# Altium PCB ETL_RB.PcbDoc (part 2 of 3)
Units mm, origin at the board's own origin, x right, y up, seen from the top; angles counter-clockwise.
Board outline 130.3 x 56.5 mm, 8 copper layers (Top Layer, plane 1, M1, plane 2, plane 3, M2, plane 4, Bottom Layer), stack 0.937 mm thick; 226 components, 231 nets, 2035 pads, 85 vias.
Unrouted connection lines stored in the file: 487.
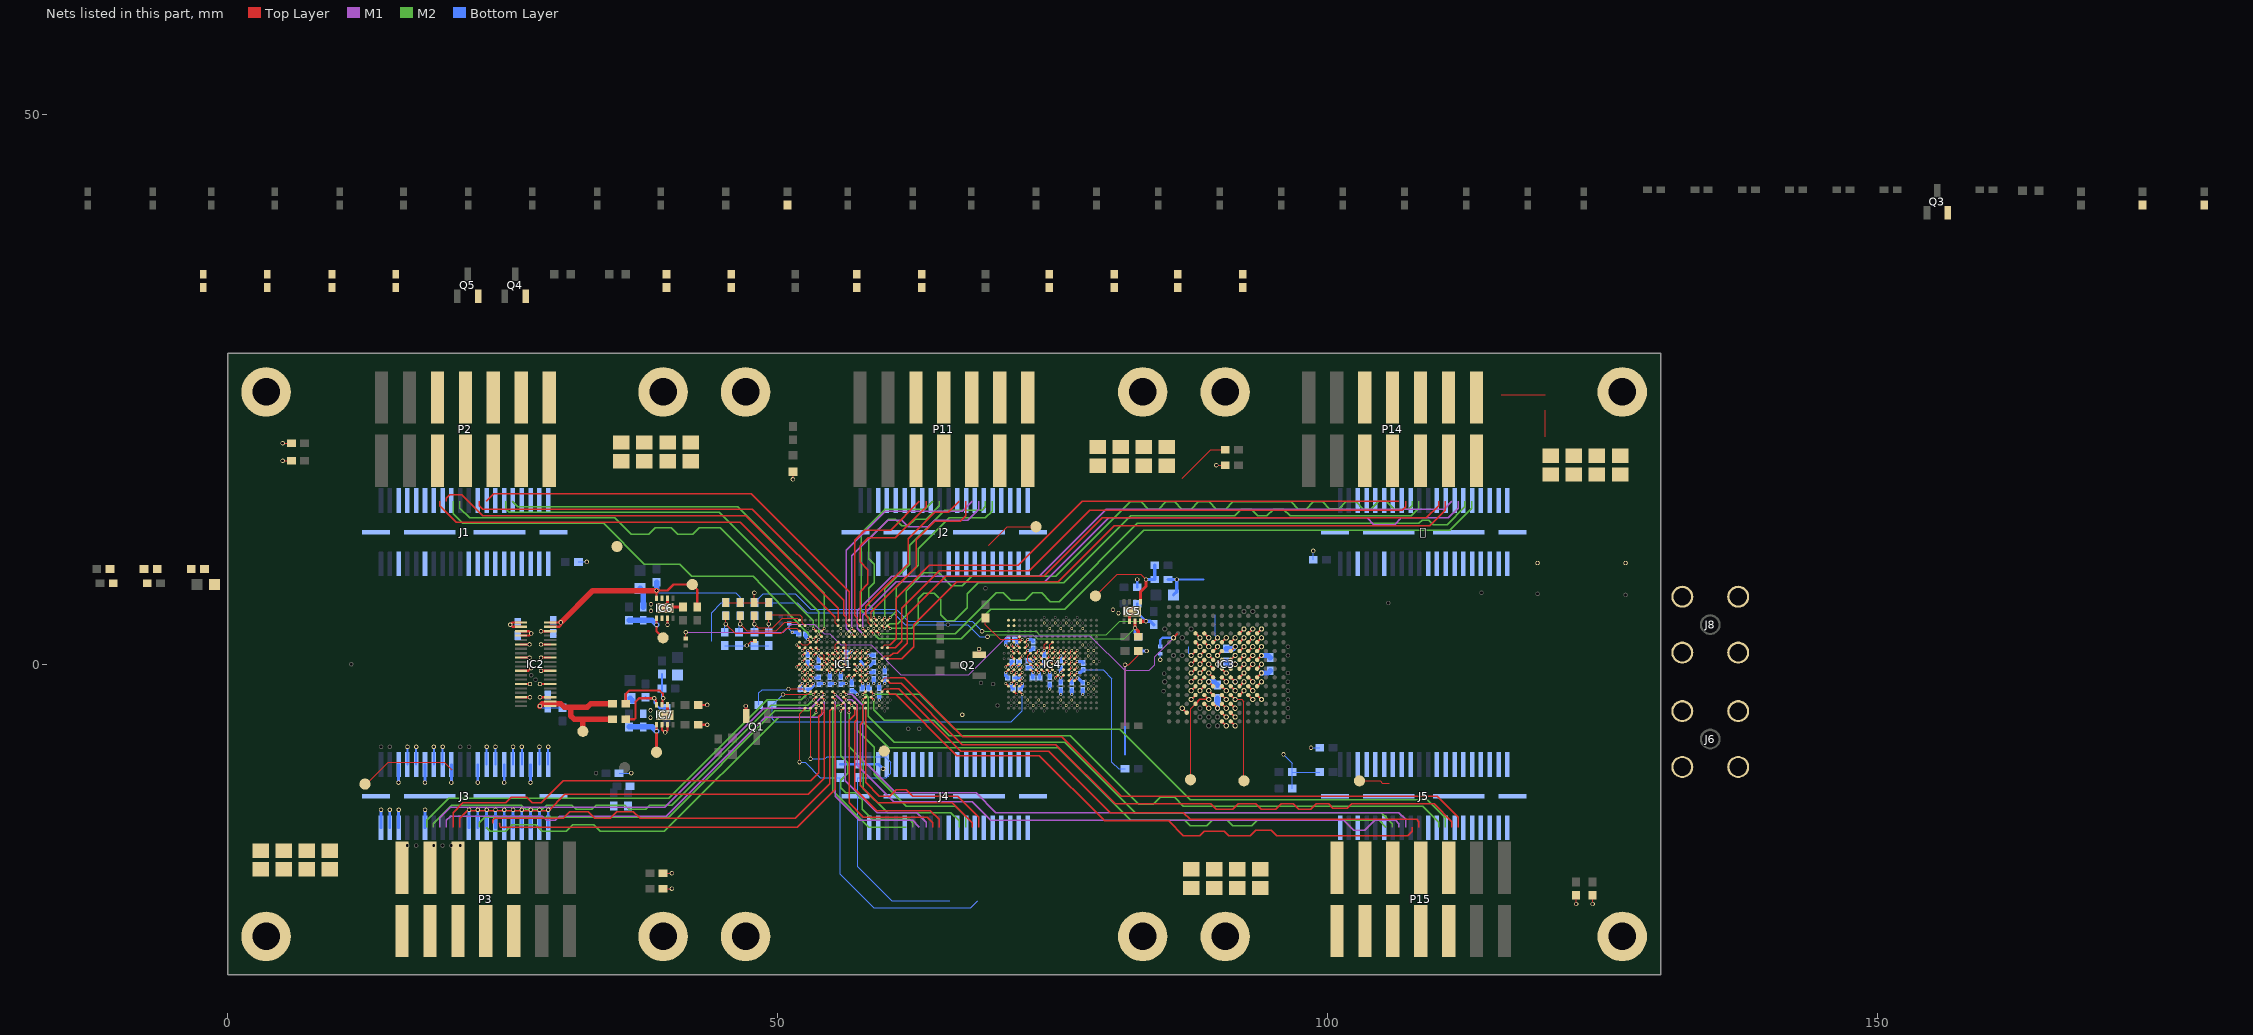
[diagram p8: the nets of this part, all layers, seen from the top]

## Via types
v1: diameter 0.4, hole 0.25, Top Layer to Bottom Layer, 85 vias

## Nets (pads, with @x,y where several pads share a name; then routed paths per layer and width w, separated by ;. In a path a pad name is that pad's centre, name@x,y a point inside that pad or via, vN(x,y) a via of type N, cw(c..) or ccw(c..) an arc to the next point about the centre after c; other vN are vias at no path point)
1V2_RB: C111.1 C112.1 C113.1 C114.1 C115.1 C116.1 C117.1 C118.1 C119.1 C120.1 C121.1 C122.1 C123.1 C124.1 C125.1 C126.1 C127.1 C128.1 C129.1 C130.1 C131.1 C132.1 C133.1 C134.1 C135.1 C160.1 C162.1 C163.1 C164.1 C165.1 C166.1 C167.1 C168.1 IC1.D3 IC1.E1 IC1.E3 IC1.E4 IC1.E9 IC1.F3 IC1.F9 IC1.G3 IC1.G5 IC1.H3 IC1.J3 IC1.J5 IC1.J6 IC1.J7 IC1.J8 IC1.J9 IC1.J11 IC1.K3 IC1.K5 IC1.K6 IC1.K7 IC1.K8 IC1.K9 IC1.K11 IC1.K12 IC1.K13 IC1.L3 IC1.L10 IC1.L11 IC1.L12 IC1.L13 IC1.M3 IC1.M12 IC1.M13 IC1.N3 IC1.P2 IC2.38 IC2.40 IC4.D3 IC4.E2 IC4.E3 IC4.E4 IC4.F3 IC4.G3 IC4.G5 IC4.H3 IC4.J3 IC4.J5 IC4.J6 IC4.J7 IC4.J8 IC4.J9 IC4.J11 IC4.K3 IC4.K6 IC4.K7 IC4.K8 IC4.K9 IC4.K11 IC4.K12 IC4.K13 IC4.L3 IC4.L10 IC4.L11 IC4.L12 IC4.L13 IC4.M3 IC4.M12 IC4.M13 IC4.N3 IC4.P2 IC4.T3 IC6.2 IC6.3 IC7.2 IC7.3 P11.10 P11.11 P11.12 P11.13 P11.14 pad.1@25.7,3.6 pad.1@36.7,-9.9 pad.1@52.75,1.25 pad.1@52.75,2.25 pad.1@52.75,-1.25 pad.1@53.25,0.25 pad.1@53.25,1.25 pad.1@53.25,-0.25 pad.1@53.25,-0.75 pad.1@53.25,-1.25 pad.1@53.25,-1.75 pad.1@53.75,2.25 pad.1@54.25,0.25 pad.1@54.25,-0.25 pad.1@54.75,-0.25 pad.1@54.75,-0.75 pad.1@55.25,-0.25 pad.1@55.25,-0.75 pad.1@55.75,-0.25 pad.1@55.75,-0.75 pad.1@56.25,-0.25 pad.1@56.25,-1.25 pad.1@56.75,-1.25 pad.1@57.25,-0.25 pad.1@57.25,-0.75 pad.1@57.75,-0.75 pad.1@57.75,-1.25 pad.1@57.75,-1.75 pad.1@58.25,-0.25 pad.1@58.25,-0.75 pad.1@58.25,-1.25 pad.1@59.25,-1.75 pad.1@59.75,-1.75 pad.1@66.8,-4.6 pad.1@71.75,1.25 pad.1@71.75,1.75 pad.1@71.75,-0.25 pad.1@72.25,0.75 pad.1@72.25,2.25 pad.1@72.25,-0.25 pad.1@72.25,-0.75 pad.1@72.25,-1.25 pad.1@72.25,-1.75 pad.1@72.75,2.25 pad.1@73.25,-0.25 pad.1@73.75,0.25 pad.1@73.75,-0.25 pad.1@73.75,-0.75 pad.1@74.25,-0.25 pad.1@74.25,-0.75 pad.1@74.75,0.25 pad.1@74.75,-0.25 pad.1@74.75,-0.75 pad.1@75.25,-1.25 pad.1@75.75,-0.75 pad.1@75.75,-1.25 pad.1@76.25,0.25 pad.1@76.75,-0.25 pad.1@76.75,-0.75 pad.1@76.75,-1.25 pad.1@77.25,-0.25 pad.1@77.25,-0.75 pad.1@77.25,-1.25 R14.1 R15.1 R101.2 R103.1 R104.1 R105.2 R106.2 R107.1 R109.2 R110.2 R202.2 R204.2 R206.2 R208.2 R210.2 R237.2 R238.2 R239.2 R244.2 R245.2 R246.2 TP6.1 | length 90.3
  Top Layer w0.076: R204.2@39.6,-20.4 v1(40.4,-20.4) ; v1(51,-2.25) 52.25,-2.25 IC1.P2@52.5,-2.5 ; IC1.E1@52,2 52.25,1.75 52.75,1.75 IC1.E3@53,2 ; pad.1@52.75,2.25 IC1.D3@53,2.5 ; IC1.K5@54,-0.5 pad.1@54.25,-0.25 ; IC1.G5@54,1 54.25,0.75 pad.1@54.25,0.25 ; IC1.F9@56,1.5 56.25,1.5 ; IC1.E9@56,2 56.25,1.75 56.25,1.5 ; pad.1@56.25,-0.25 56.25,1.5 ; R238.2@68.9,4.2 68.9,3.6 70.25,2.25 72,2.25 ; IC4.D3@72,2.5 72,2.25 ; pad.1@72.25,2.25 72,2.25 ; IC4.J5@73,0 72.75,0.25 72.75,0.75 IC4.G5@73,1 ; 86.8,16.9 89.4,19.5 R206.2@90.7,19.5 ; v1(122.6,-21.8) R208.2@122.6,-21
  Top Layer w0.102: v1(5,20.1) R202.2@5.8,20.1
  Top Layer w0.13: pad.1@52.75,-1.25 IC1.M3@53,-1.5 ; pad.1@52.75,1.25 IC1.G3@53,1 ; pad.1@52.75,2.25 IC1.E3@53,2 ; IC1.N3@53,-2 pad.1@53.25,-1.75 ; IC1.L3@53,-1 pad.1@53.25,-1.25 ; IC1.K3@53,-0.5 pad.1@53.25,-0.75 ; IC1.J3@53,0 pad.1@53.25,-0.25 ; IC1.H3@53,0.5 pad.1@53.25,0.25 ; IC1.F3@53,1.5 pad.1@53.25,1.25 ; IC1.E4@53.5,2 pad.1@53.75,2.25 ; IC1.J5@54,0 pad.1@54.25,-0.25 ; pad.1@54.25,0.25 IC1.J6@54.5,0 ; IC1.K6@54.5,-0.5 pad.1@54.75,-0.75 ; pad.1@54.75,-0.25 IC1.K7@55,-0.5 ; IC1.J7@55,0 pad.1@55.25,-0.25 ; pad.1@55.25,-0.75 IC1.K8@55.5,-0.5 ; IC1.J8@55.5,0 pad.1@55.75,-0.25 ; pad.1@55.75,-0.75 IC1.K9@56,-0.5 ; IC1.J9@56,0 pad.1@56.25,-0.25 ; pad.1@56.25,-1.25 IC1.L10@56.5,-1 ; pad.1@56.75,-1.25 IC1.L11@57,-1 ; IC1.K11@57,-0.5 pad.1@57.25,-0.75 ; IC1.J11@57,0 pad.1@57.25,-0.25 ; IC1.M12@57.5,-1.5 pad.1@57.75,-1.75 ; IC1.L12@57.5,-1 pad.1@57.75,-1.25 ; IC1.K12@57.5,-0.5 pad.1@57.75,-0.75 ; IC1.M13@58,-1.5 pad.1@58.25,-1.25 ; IC1.L13@58,-1 pad.1@58.25,-0.75 ; IC1.K13@58,-0.5 pad.1@58.25,-0.25 ; IC4.P2@71.5,-2.5 71.75,-2.75 ; pad.1@71.75,-0.25 IC4.J3@72,0 ; pad.1@71.75,1.25 IC4.G3@72,1 ; pad.1@71.75,1.75 IC4.F3@72,1.5 ; IC4.N3@72,-2 pad.1@72.25,-1.75 ; IC4.M3@72,-1.5 pad.1@72.25,-1.25 ; IC4.L3@72,-1 pad.1@72.25,-0.75 ; IC4.K3@72,-0.5 pad.1@72.25,-0.25 ; IC4.H3@72,0.5 pad.1@72.25,0.75 ; IC4.E3@72,2 pad.1@72.25,2.25 ; IC4.E4@72.5,2 pad.1@72.75,2.25 ; IC4.J5@73,0 pad.1@73.25,-0.25 ; IC4.K6@73.5,-0.5 pad.1@73.75,-0.75 ; IC4.J6@73.5,0 pad.1@73.75,-0.25 ; pad.1@73.75,0.25 IC4.J7@74,0 ; IC4.K7@74,-0.5 pad.1@74.25,-0.75 ; pad.1@74.25,-0.25 IC4.J8@74.5,0 ; IC4.K8@74.5,-0.5 pad.1@74.75,-0.75 ; pad.1@74.75,-0.25 IC4.K9@75,-0.5 ; pad.1@74.75,0.25 IC4.J9@75,0 ; pad.1@75.25,-1.25 IC4.L10@75.5,-1 ; pad.1@75.75,-1.25 IC4.L11@76,-1 ; pad.1@75.75,-0.75 IC4.K11@76,-0.5 ; IC4.J11@76,0 pad.1@76.25,0.25 ; IC4.M12@76.5,-1.5 pad.1@76.75,-1.25 ; IC4.L12@76.5,-1 pad.1@76.75,-0.75 ; IC4.K12@76.5,-0.5 pad.1@76.75,-0.25 ; IC4.M13@77,-1.5 pad.1@77.25,-1.25 ; IC4.L13@77,-1 pad.1@77.25,-0.75 ; IC4.K13@77,-0.5 pad.1@77.25,-0.25
  Top Layer w0.2: IC2.38@26.67,3.4 25.9,3.4 pad.1@25.7,3.6 25.9,3.8 IC2.40@26.67,3.8 ; IC7.2@39.5,-5.5 39.5,-5.945 39.755,-6.2 v1(39.8,-6.2) 39.8,-6.19 40,-5.99 IC7.3@40,-5.5 ; v1(40,3.6) IC6.3@40,4.2
  Bottom Layer w0.076: C133.1@71.56,2.25 C133.1@71.6,2.25
  Bottom Layer w0.102: R239.2@31.9,9.3 32.6,9.3 v1(32.65,9.3) ; R103.1@35.6,-9.9 pad.1@36.7,-9.9 ; R101.2@48.3,-3.7 48.3,-2.6 48.6,-2.3 50.95,-2.3 v1(51,-2.25) ; C166.1@77.8,-0.51 77.81,-0.5 79.6,-0.5 80.4,-1.3 80.4,-8.9 81,-9.5 R107.1@81.6,-9.5 ; v1(96,-8.2) 96.8,-9 R210.2@96.8,-9.8 ; R245.2@96.8,-11.3 R210.2@96.8,-9.8 ; v1(98.5,-7.6) R244.2@99.3,-7.6 ; R237.2@98.7,9.5 98.7,9.6 v1(98.7,10.3) ; R246.2@99.3,-9.8 R210.2@96.8,-9.8
  Bottom Layer w0.13: pad.1@71.75,-0.25 pad.1@71.8,-0.2
  Bottom Layer w0.2: pad.1@53.75,2.25 pad.1@53.79,2.25 ; C113.1@59.75,-1.31 59.79,-1.31 C113.1@59.8,-1.3
  Bottom Layer w0.25: R110.2@55.7,-9.1 59.2,-9.1 v1(59.6,-9.5)
  Bottom Layer w0.3: C119.1@52.56,2.75 52.56,2.44 pad.1@52.75,2.25 ; C125.1@52.71,-2.3 52.9,-2.3 53.25,-1.95 pad.1@53.25,-1.75 ; C116.1@52.75,0.81 pad.1@52.75,1.25 ; pad.1@53.25,-1.25 53.69,-1.25 C117.1@53.75,-1.19 ; pad.1@53.25,-0.25 53.75,-0.25 C126.1@53.75,-0.31 ; C114.1@54.75,-1.19 pad.1@54.75,-0.75 ; C122.1@55.75,-1.19 pad.1@55.75,-0.75 ; pad.1@56.25,-0.25 C120.1@56.25,0.44 ; C118.1@56.75,-1.79 pad.1@56.75,-1.25 ; C123.1@57.7,-2.25 C123.1@57.69,-2.25 57.75,-2.19 pad.1@57.75,-1.75 ; pad.1@58.25,-0.75 58.69,-0.75 C115.1@58.75,-0.69 ; pad.1@58.25,-0.25 58.31,-0.25 58.409,-0.151 58.416,-0.151 58.651,0.084 58.651,0.091 C124.1@58.75,0.19 ; C121.1@59.25,-2.19 pad.1@59.25,-1.75 ; pad.1@59.75,-1.75 C113.1@59.75,-1.31 ; C130.1@71.56,-1.25 pad.1@72.25,-1.25 ; C133.1@71.6,2.25 71.75,2.1 pad.1@71.75,1.75 ; pad.1@71.8,-0.2 71.96,-0.04 C164.1@71.96,0.25 ; C132.1@72.06,-2.25 72.25,-2.06 pad.1@72.25,-1.75 ; C163.1@72.75,-0.31 73.19,-0.31 pad.1@73.25,-0.25 ; pad.1@72.75,2.25 73.06,2.25 C167.1@73.25,2.06 ; pad.1@73.75,-0.75 73.81,-0.81 C168.1@73.81,-1.25 ; pad.1@74.25,-0.25 C129.1@74.25,0.19 ; C128.1@74.75,-1.19 pad.1@74.75,-0.75 ; C134.1@75.75,-1.69 pad.1@75.75,-1.25 ; pad.1@75.75,-0.75 C131.1@75.75,-0.31 ; C165.1@76.75,-1.69 pad.1@76.75,-1.25 ; pad.1@77.25,-1.25 77.3,-1.25 77.75,-1.7 C135.1@77.75,-1.69 ; pad.1@77.25,-0.75 77.56,-0.75 C166.1@77.8,-0.51
1V2A: C218.1 C219.1 C220.1 C221.1 J1.01 J1.03 J1.05 J1.07 J1.09 J1.11 J1.13 J1.15 J1.17 J1.19 J3.11 J3.13 J3.15 J3.17 J3.19 P2.10 P2.11 P2.12 P2.13 P2.14 pad.1@21.955,-13.239 pad.1@22.755,-13.239 pad.1@23.555,-13.239 pad.1@24.355,-13.239 pad.1@25.155,-13.239 R20.2 TP1.1 | length 17.3
  Top Layer w0.102: TP1.1@12.5,-10.9 12.6,-10.9 14.6,-8.9 19.7,-8.9 20.4,-9.6
  Bottom Layer w0.254: J3.19@21.95,-14.865 pad.1@21.95,-13.2 ; J3.17@22.75,-14.865 pad.1@22.75,-13.2 ; J3.15@23.55,-14.865 pad.1@23.55,-13.2 ; J3.13@24.35,-14.865 pad.1@24.35,-13.2 ; J3.11@25.15,-14.865 pad.1@25.15,-13.2
1v2a_mon: C33.1 IC4.A2 R20.1 R21.2
1V2B: C222.1 C223.1 C224.1 C225.1 J3.01 J3.03 J3.05 J3.07 J3.09 J4.01 J4.03 J4.05 J4.07 J4.09 J4.11 J4.13 J4.15 J4.17 J4.19 P3.10 P3.11 P3.12 P3.13 P3.14 pad.1@26.755,-13.239 pad.1@27.555,-13.239 pad.1@28.355,-13.239 pad.1@29.155,-13.239 R22.2 TP2.1 | length 6.7
  Bottom Layer w0.254: J3.07@26.75,-14.865 pad.1@26.75,-13.2 ; J3.05@27.55,-14.865 pad.1@27.55,-13.2 ; J3.03@28.35,-14.865 pad.1@28.35,-13.2 ; J3.01@29.15,-14.865 pad.1@29.15,-13.2
1v2b_mon: C34.1 IC4.A1 R22.1 R23.2
1V2C: .01 .03 .05 .07 .09 C226.1 C227.1 C228.1 C229.1 J2.01 J2.03 J2.05 J2.07 J2.09 J2.11 J2.13 J2.15 J2.17 J2.19 P14.10 P14.11 P14.12 P14.13 P14.14 R25.2 TP3.1 | length 9
  Top Layer w0.102: 69.2,10.8 70.9,12.5 TP3.1@73.5,12.5 ; 115.8,24.5 119.8,24.5
1v2c_mon: C35.1 IC4.B2 R25.1 R26.2
1V2D: .11 .13 .15 .17 .19 C230.1 C231.1 C232.1 C233.1 J5.01 J5.03 J5.05 J5.07 J5.09 J5.11 J5.13 J5.15 J5.17 J5.19 P15.10 P15.11 P15.12 P15.13 P15.14 R27.2 TP4.1 | length 2.8
  Top Layer w0.102: TP4.1@102.9,-10.6 104.8,-10.6 105,-10.8 105.6,-10.8
1v2d_mon: C36.1 IC4.B1 R27.1 R28.2
1V4D: C139.1 C140.1 IC3.D9 IC3.D10 IC3.D11 IC3.E9 IC3.E10 IC3.E11 IC3.F8 IC3.F9 IC3.F10 IC3.F11 IC3.G8 IC3.G9 IC3.G10 IC3.G11 IC3.H8 IC3.H9 IC3.H10 IC3.H11 IC5.8 pad.1@68.6,3 pad.1@90.8,-0.8 pad.1@90.8,-1.6 pad.1@90.8,-2.4 pad.1@90.8,-3.2 pad.1@91.6,0 pad.1@91.6,-1.6 pad.1@91.6,-2.4 pad.1@91.6,-3.2 pad.1@92.4,0 pad.1@92.4,-0.8 pad.1@92.4,-1.6 pad.1@92.4,-2.4 pad.1@93.2,-1.6 pad.1@93.2,-2.4 pad.1@93.2,-3.2 pad.1@94,-0.8 pad.1@94,-1.6 pad.1@94,-3.2 R111.1 R117.2 R127.1 TP8.1 | length 61.2
  Top Layer w0.102: pad.1@91.6,-3.2 92.2,-3.2 92.4,-3.4 TP8.1@92.4,-10.6
  Top Layer w0.13: IC3.H11@90.4,-2.8 pad.1@90.8,-3.2 ; IC3.H10@90.4,-2 pad.1@90.8,-2.4 ; IC3.H9@90.4,-1.2 pad.1@90.8,-1.6 ; IC3.H8@90.4,-0.4 pad.1@90.8,-0.8 ; IC3.G11@91.2,-2.8 pad.1@91.6,-3.2 ; IC3.G10@91.2,-2 pad.1@91.6,-2.4 ; IC3.G9@91.2,-1.2 pad.1@91.6,-1.6 ; IC3.G8@91.2,-0.4 pad.1@91.6,0 ; IC3.F11@92,-2.8 pad.1@92.4,-2.4 ; IC3.F10@92,-2 pad.1@92.4,-1.6 ; IC3.F9@92,-1.2 pad.1@92.4,-0.8 ; IC3.F8@92,-0.4 pad.1@92.4,0 ; IC3.E11@92.8,-2.8 pad.1@93.2,-3.2 ; IC3.E10@92.8,-2 pad.1@93.2,-2.4 ; IC3.E9@92.8,-1.2 pad.1@93.2,-1.6 ; IC3.D11@93.6,-2.8 pad.1@94,-3.2 ; IC3.D10@93.6,-2 pad.1@94,-1.6 ; IC3.D9@93.6,-1.2 pad.1@94,-0.8
  Top Layer w0.3: IC5.8@83,3.9 v1(83.5,3.9)
  M2 w0.102: pad.1@68.6,3 73.5,3 73.8,2.7 79.9,2.7 81.1,3.9 v1(83.5,3.9)
  Bottom Layer w0.102: R117.2@47.9,5.6 48.7,6.4 51.6,6.4 53,5 60.8,5 61.9,3.9 67.7,3.9 pad.1@68.6,3
  Bottom Layer w0.2: R127.1@82.7,5.5 82.7,4.7 v1(83.5,3.9)
  Bottom Layer w0.3: v1(83.5,3.9) 83.9,3.9 R111.1@84.2,3.6
  Bottom Layer w0.48: C140.1@90.8,0.2 91,0 pad.1@91.6,0 ; pad.1@94,-0.8 94.6,-0.8 C139.1@94.8,-0.6
1V4D_ADC: C109.1 IC1.A1 R117.1 R118.2 | length 7
  Top Layer w0.076: v1(47.9,3.65) C109.1@47.9,4.4
  Top Layer w0.102: v1(47.9,3.65) 48.25,3.3 49.55,3.3 50.45,4.2 51.8,4.2 IC1.A1@52,4
  Bottom Layer w0.102: R118.2@47.9,2.9 v1(47.9,3.65) R117.1@47.9,4.4
1V5A: C138.1 IC3.J7 IC3.J8 IC3.J9 IC3.J10 IC3.J11 IC3.K7 IC3.K8 IC3.K9 IC3.K10 IC3.K11 IC3.L12 IC5.7 pad.1@88.4,0 pad.1@88.4,-0.8 pad.1@88.4,-1.6 pad.1@88.4,-2.4 pad.1@89.2,0 pad.1@89.2,0.8 pad.1@89.2,-0.8 pad.1@89.2,-1.6 pad.1@89.2,-2.4 pad.1@89.2,-3.2 pad.v@69.1,2.5 R113.1 R128.1 R133.2 TP7.1 | length 53.1
  Top Layer w0.102: TP7.1@87.55,-10.5 87.55,-4.05 IC3.L12@88,-3.6
  Top Layer w0.13: IC3.L12@88,-3.6 88.4,-3.2 pad.1@89.2,-3.2 IC3.K11@88.8,-2.8 ; pad.1@88.4,-2.4 IC3.K10@88.8,-2 ; pad.1@88.4,-1.6 IC3.K9@88.8,-1.2 ; pad.1@88.4,-0.8 IC3.K8@88.8,-0.4 ; pad.1@88.4,0 IC3.K7@88.8,0.4 ; pad.1@89.2,-2.4 IC3.J11@89.6,-2.8 ; pad.1@89.2,-1.6 IC3.J10@89.6,-2 ; pad.1@89.2,-0.8 IC3.J9@89.6,-1.2 ; pad.1@89.2,0 IC3.J8@89.6,-0.4 ; pad.1@89.2,0.8 IC3.J7@89.6,0.4
  Top Layer w0.3: IC5.7@82.5,3.9 v1(82.5,3.3) 82.8,3 R113.1@82.8,2.5 R113.1@82.9,2.6
  M2 w0.102: pad.v@69.1,2.5 69.3,2.7 73.2,2.7 73.6,2.3 81.5,2.3 v1(82.5,3.3)
  Bottom Layer w0.102: R133.2@49.3,5.5 49.4,5.6 51.8,5.6 52.7,4.7 60.5,4.7 61.6,3.6 67.3,3.6 68.4,2.5 pad.v@69.1,2.5
  Bottom Layer w0.3: v1(82.5,3.3) 82.5,2.8 R128.1@82.8,2.5 R128.1@82.9,2.6
  Bottom Layer w0.48: R133.2@49.2,5.6 R133.2@49.3,5.5 ; pad.1@89.2,-1.6 89.7,-1.6 C138.1@90,-1.9
1V5A_ADC: C141.1 IC1.B2 R133.1 R134.2 | length 6.4
  Top Layer w0.076: v1(49.2,3.65) C141.1@49.2,4.4 ; 52.25,4.25 52.25,3.75 IC1.B2@52.5,3.5
  Top Layer w0.102: C141.1@49.2,4.4 49.3,4.5 52,4.5 52.25,4.25
  Bottom Layer w0.102: R134.2@49.2,2.9 v1@49.2,3.7 ; R133.1@49.2,4.4 v1@49.2,3.7 ; v1@49.2,3.7 v1(49.2,3.65) v1@49.2,3.7
2V5RX: C154.1 IC2.1 IC2.3 pad.1@28.4,-3.8 R9.1 R10.1 R135.2 R148.2 TP9.1 | length 19.4
  Top Layer w0.5: pad.1@28.4,-3.8 28.6,-3.6 30.3,-3.6 30.6,-3.9 31.3,-3.9 ; TP9.1@32.3,-6.1 32.3,-5 ; R9.1@35,-5 32.3,-5 ; R10.1@35,-3.6 33,-3.6 32.7,-3.9 31.3,-3.9 ; 31.3,-3.9 31.2,-4 31.2,-4.7 31.5,-5 32.3,-5
  Bottom Layer w0.102: pad.1@28.4,-3.8 28.55,-3.95 R148.2@30.45,-3.95 ; 44,2.1 44,4.7 44.9,5.6 45.4,5.6 R135.2@45.3,5.6
2V5RX_A: IC7.8 R9.2 R124.1 R125.2 | length 7.5
  Top Layer w0.2: R9.2@36.2,-5 36.983,-5 37.1,-4.883 37.1,-3.4 37.4,-3.1 v1(38.8,-3.1) 38.8,-3.154 38.95,-3.304 38.95,-3.65 IC7.8@39,-3.7
  Bottom Layer w0.2: R125.2@38,-3 38.1,-3.1 v1(38.8,-3.1) 38.838,-3.138 38.838,-3.538 39.3,-4 R124.1@39.9,-4
2V5RX_ADC: C151.1 IC1.C1 R122.2 R135.1 | length 9.6
  Top Layer w0.102: C151.1@45.3,4.4 v1(45.3,3.65) 46.15,2.8 50.35,2.8 50.8,3.25 51.75,3.25 IC1.C1@52,3
  Bottom Layer w0.102: R122.2@45.2,2.9 45.2,3.6 45.3,3.7 R135.1@45.3,4.4
2V5RX_B: IC7.7 R10.2 R11.2 R13.1 | length 7.8
  Top Layer w0.2: R10.2@36.2,-3.6 36.2,-2.7 36.5,-2.4 39.3,-2.4 39.6,-2.7 v1(39.6,-3.1) 39.6,-3.154 39.533,-3.221 39.533,-3.667 IC7.7@39.5,-3.7
  Bottom Layer w0.2: R11.2@39.5,-0.9 R13.1@39.5,-2.2 39.5,-2.946 39.6,-3.046 v1(39.6,-3.1)
2V5TX: C153.1 IC2.37 IC2.39 R4.1 R5.1 R119.2 TP10.1 | length 27.7
  Top Layer w0.2: IC2.37@29.33,3.4 30.169,3.4 30.287,3.517 30.287,3.787 v1(30.3,3.8) IC2.39@29.33,3.8 ; 39,6 v1(39,6.7) 40,6.7 40.55,7.25 TP10.1@42.25,7.25 42.7,6.8 42.7,5.2
  Top Layer w0.5: v1(30.3,3.8) 33.2,6.7 v1(39,6.7)
  Bottom Layer w0.102: v1(39,6.7) 39.2,6.5 46.2,6.5 46.6,6.1 R119.2@46.6,5.6
  Bottom Layer w0.5: v1(39,6.7) 39,7.45
2V5TX_A: IC6.8 R4.2 R114.2 R116.1
2V5TX_ADC: C150.1 IC1.B1 R119.1 R120.2 | length 8.4
  Top Layer w0.102: C150.1@46.6,4.4 v1(46.6,3.65) 47.2,3.05 49.9,3.05 50.65,3.8 51.7,3.8 IC1.B1@52,3.5
  Bottom Layer w0.102: R120.2@46.5,2.9 46.5,3.6 46.6,3.7 R119.1@46.6,4.4
2V5TX_B: IC6.7 R5.2 R6.2 R8.1
: .33 J1.33 J2.33
ADC_IN29: pad.1@86,2.4 R243.1 RT2.2 | length 54
  Top Layer w0.102: R243.1@41.65,2.35 v1(41.65,2.9)
  Top Layer w0.13: pad.1@86,2.4 86.4,2.8
  M1 w0.102: v1(41.65,2.9) 50.5,2.9 51.25,3.65 53.35,3.65 54.25,2.75 54.75,2.75 55.75,1.75 58.5,1.75 61.2,-0.95 67.4,-0.95 70.95,2.6 78.4,2.6 81.55,-0.55 83.8,-0.55 84.3,-0.05 84.3,0.7 pad.1@86,2.4
  Bottom Layer w0.2: RT2.2@84.8,1.6 84.8,2.2 85,2.4 pad.1@86,2.4
ECLK0N: IC1.U4 J3.28 pad.1@18.755,-7.509 pad.1@53.5,-4.4 | length 37.7
  Top Layer w0.13: pad.1@53.5,-4.4 IC1.U4@53.5,-4
  M2 w0.12: 23.5,-14.8 23.9,-15.2 25.3,-15.2 25.9,-14.6 28,-14.6 28.6,-15.2 30.8,-15.2 31.4,-14.6 33.3,-14.6 33.9,-15.2 39.7,-15.2 50.1,-4.8 53.1,-4.8 pad.1@53.5,-4.4
  Bottom Layer w0.178: J3.28@18.75,-9.135 pad.1@18.75,-7.47
ECLK0P: IC1.T4 J3.26 pad.1@19.555,-7.509 pad.1@53.75,-3.75 | length 37.7
  Top Layer w0.13: IC1.T4@53.5,-3.5 pad.1@53.75,-3.75
  M2 w0.12: 22.9,-14.8 22.9,-14.4 23.4,-13.9 40.1,-13.9 49.75,-4.25 52.85,-4.25 53.35,-3.75 pad.1@53.75,-3.75
  Bottom Layer w0.178: J3.26@19.55,-9.135 pad.1@19.55,-7.47
ECLK1N: IC1.R4 J3.04 pad.1@28.355,-7.509 pad.1@53.25,-3.25 | length 42.5
  Top Layer w0.13: pad.1@53.25,-3.25 IC1.R4@53.5,-3
  M2 w0.12: 18.7,-14.8 18.7,-14.5 20.4,-12.8 26.7,-12.8 27.1,-13.2 28.6,-13.2 29,-12.8 31.3,-12.8 31.7,-13.2 33.1,-13.2 33.5,-12.8 36.1,-12.8 36.5,-13.2 38,-13.2 38.4,-12.8 40.4,-12.8 49.45,-3.75 52.75,-3.75 pad.1@53.25,-3.25
  Bottom Layer w0.178: J3.04@28.35,-9.135 pad.1@28.35,-7.47
ECLK1P: IC1.P4 J3.02 pad.1@29.155,-7.509 pad.1@53.25,-2.75 | length 42.5
  Top Layer w0.13: pad.1@53.25,-2.75 IC1.P4@53.5,-2.5
  M2 w0.12: 18.1,-14.8 18.1,-14.2 20.1,-12.2 40.1,-12.2 49.05,-3.25 52.15,-3.25 52.65,-2.75 pad.1@53.25,-2.75
  Bottom Layer w0.178: J3.02@29.15,-9.135 pad.1@29.15,-7.47
ECLK2N: IC1.U9 J4.04 pad.1@55.75,-4.25 | length 16.7
  Top Layer w0.13: pad.1@55.75,-4.25 IC1.U9@56,-4
  M2 w0.12: pad.1@55.75,-4.25 55.75,-8.3 56.4,-8.95 56.4,-9.9 55.75,-10.55 55.75,-11.25 56.2,-11.7 57.1,-11.7 57.7,-12.3 57.7,-13.2 58.6,-14.1 62,-14.1 62.3,-14.4 62.3,-14.8
ECLK2P: IC1.T9 J4.02 pad.1@55.75,-3.75 | length 16.7
  Top Layer w0.13: pad.1@55.75,-3.75 IC1.T9@56,-3.5
  M2 w0.12: pad.1@55.75,-3.75 55.45,-3.75 55,-4.2 55,-11.5 58.3,-14.8 61.7,-14.8
ECLK3N: IC1.U10 J4.26 pad.1@56.5,-4.4 | length 18.3
  Top Layer w0.13: pad.1@56.5,-4.4 IC1.U10@56.5,-4
  M2 w0.12: pad.1@56.5,-4.4 56.5,-7.5 57.8,-8.8 57.8,-11.3 60,-13.5 62.3,-13.5 65.75,-13.5 66.5,-14.25 66.5,-14.8
ECLK3P: IC1.T10 J4.28 pad.1@56.75,-3.75 | length 18.3
  Top Layer w0.13: IC1.T10@56.5,-3.5 pad.1@56.75,-3.75
  M2 w0.12: pad.1@56.75,-3.75 57.25,-4.25 57.25,-6 58.8,-7.55 58.8,-10 61.7,-12.9 62.7,-12.9 66.15,-12.9 67.1,-13.85 67.1,-14.8
ECLK4N: IC1.R13 J5.02 pad.1@57.75,-3.25 | length 54.7
  Top Layer w0.13: pad.1@57.75,-3.25 IC1.R13@58,-3
  M2 w0.12: pad.1@57.75,-3.25 57.75,-5.25 60.1,-7.6 75.5,-7.6 82.1,-14.2 87,-14.2 87.5,-14.7 89,-14.7 89.5,-14.2 90.9,-14.2 91.4,-14.7 93.1,-14.7 93.6,-14.2 104.7,-14.2 105.3,-14.8
ECLK4P: IC1.P13 J5.04 pad.1@57.75,-2.75 | length 54.7
  Top Layer w0.13: pad.1@57.75,-2.75 IC1.P13@58,-2.5
  M2 w0.12: pad.1@57.75,-2.75 58,-2.75 58.25,-3 58.25,-4.75 60.6,-7.1 76.1,-7.1 82.5,-13.5 104.9,-13.5 105.9,-14.5 105.9,-14.8
ECLK5N: IC1.R14 J5.26 pad.1@58.75,-3.25 | length 57.8
  Top Layer w0.13: IC1.R14@58.5,-3 pad.1@58.75,-3.25
  M2 w0.12: pad.1@58.75,-3.25 58.75,-4.15 59.7,-5.1 64.2,-5.1 65.6,-6.5 76.6,-6.5 82.85,-12.75 84.15,-12.75 84.8,-12.1 86.1,-12.1 86.9,-12.9 108.65,-12.9 110.1,-14.35 110.1,-14.8
ECLK5P: IC1.P14 J5.28 pad.1@58.75,-2.75 | length 57.8
  Top Layer w0.13: IC1.P14@58.5,-2.5 pad.1@58.75,-2.75
  M2 w0.12: pad.1@58.75,-2.75 62.95,-2.75 66.1,-5.9 81.1,-5.9 87.5,-12.3 109.05,-12.3 110.7,-13.95 110.7,-14.8
ECLK22N: .26 IC1.B17 pad.1@60.25,3.25 | length 59.4
  Top Layer w0.13: IC1.B17@60,3.5 pad.1@60.25,3.25
  M2 w0.12: pad.1@60.25,3.25 62.225,3.25 62.8,3.825 62.8,5.95 63.3,6.45 64.25,6.45 64.85,5.85 64.85,4.5 65.4,3.95 66.05,3.95 67.25,5.15 67.25,6.4 68.25,7.4 76,7.4 82.1,13.5 91.55,13.5 92.15,14.1 93.05,14.1 93.65,13.5 94.5,13.5 95.1,14.1 96,14.1 96.6,13.5 107.6,13.5 108.3,14.2 108.3,14.8
ECLK22P: .28 IC1.B16 pad.1@59.75,3.25 | length 59.4
  Top Layer w0.13: IC1.B16@59.5,3.5 pad.1@59.75,3.25
  M2 w0.12: pad.1@59.75,3.25 60.2,3.7 60.95,3.7 61.7,4.45 61.7,6.7 63.3,8.3 64.65,8.3 65.8,7.15 66.8,7.15 67.65,8 75.3,8 82.05,14.75 83.05,14.75 83.7,14.1 84.65,14.1 85.3,14.75 86.1,14.75 86.75,14.1 87.6,14.1 88.25,14.75 89.25,14.75 89.9,14.1 90.75,14.1 91.4,14.75 96.7,14.75 97.35,14.1 98.05,14.1 98.7,14.75 99.55,14.75 100.15,14.15 101.05,14.15 101.65,14.75 102.6,14.75 103.25,14.1 103.95,14.1 104.65,14.8 105.35,14.8 106.05,14.1 107.4,14.1 107.7,14.4 107.7,14.8
ECLK23N: IC1.A17 J2.02 pad.1@60.25,4.25 | length 16.7
  Top Layer w0.13: IC1.A17@60,4 pad.1@60.25,4.25
  M2 w0.12: pad.1@60.25,4.25 60.8,4.8 60.8,7 62.8,9 62.8,10.5 65.6,13.3 68.9,13.3 69.5,13.9 69.5,14.8
ECLK23P: IC1.A16 J2.04 pad.1@59.75,4.25 | length 16.7
  Top Layer w0.13: IC1.A16@59.5,4 pad.1@59.75,4.25
  M2 w0.12: pad.1@59.75,4.25 59.75,6.85 62,9.1 62,10.8 65.2,14 68.6,14 68.9,14.3 68.9,14.8
ECLK24N: .04 IC1.C15 pad.1@59.25,2.75 | length 60.5
  Top Layer w0.13: IC1.C15@59,3 pad.1@59.25,2.75
  M2 w0.12: pad.1@59.25,2.75 66.15,2.75 69.9,6.5 70.5,6.5 71.2,5.8 72.5,5.8 73.2,6.5 74,6.5 74.8,5.7 75.6,5.7 82.7,12.8 108.3,12.8 108.6,13.1 109.2,13.1 109.6,12.7 110.9,12.7 112.5,14.3 112.5,14.8
ECLK24P: .02 IC1.C14 pad.1@58.75,2.75 | length 60.4
  Top Layer w0.13: IC1.C14@58.5,3 pad.1@58.75,2.75
  M2 w0.12: pad.1@58.75,2.75 59.2,2.3 66.7,2.3 69.4,5 76.1,5 83.3,12.2 111.1,12.2 113.1,14.2 113.1,14.8
ECLK25N: IC1.A15 J2.26 pad.1@58.752,4.25 | length 16.6
  Top Layer w0.13: pad.1@58.752,4.25 IC1.A15@59,4
  M2 w0.12: pad.1@58.752,4.25 58.75,4.252 58.75,4.95 58.3,5.4 58.3,6.9 58.8,7.4 58.8,9.1 58.3,9.6 58.3,11.4 60.1,13.2 60.7,13.2 61.3,12.6 61.9,12.6 62.5,13.2 63.5,13.2 64.7,14.4 64.7,14.8
ECLK25P: IC1.B15 J2.28 pad.1@58.75,3.75 | length 16.7
  Top Layer w0.13: pad.1@58.75,3.75 IC1.B15@59,3.5
  M2 w0.12: pad.1@58.75,3.75 57.6,4.9 57.6,11.9 59.8,14.1 63.4,14.1 64.1,14.8
ECLK26N: IC1.C5 J1.02 pad.1@54.25,3.25 | length 35.4
  Top Layer w0.13: IC1.C5@54,3 pad.1@54.25,3.25
  M2 w0.12: 25.9,14.8 26.4,14.3 46.4,14.3 54.25,6.45 pad.1@54.25,3.25
ECLK26P: IC1.D5 J1.04 pad.1@53.75,2.75 | length 35.4
  Top Layer w0.13: pad.1@53.75,2.75 IC1.D5@54,2.5
  M2 w0.12: 25.3,14.8 25.3,14.1 25.6,13.8 44.7,13.8 53.75,4.75 pad.1@53.75,2.75
ECLK27N: IC1.C4 J1.26 pad.1@53.25,3.25 | length 39
  Top Layer w0.13: pad.1@53.25,3.25 IC1.C4@53.5,3
  M2 w0.12: 21.1,14.8 21.1,14.2 22,13.3 35.2,13.3 36.7,11.8 38.3,11.8 38.9,12.4 40.35,12.4 40.95,11.8 42.3,11.8 42.9,12.4 44.8,12.4 53.25,3.95 pad.1@53.25,3.25
ECLK27P: IC1.D4 J1.28 pad.1@53.25,2.25 | length 39
  Top Layer w0.13: pad.1@53.25,2.25 IC1.D4@53.5,2.5
  M2 w0.12: 20.5,14.8 20.5,13.7 21.4,12.8 34.2,12.8 37.9,9.1 41.1,9.1 42.196,8.004 47.804,8.004 pad.1@53.25,2.25
EDIN00N: IC1.U5 J3.14 pad.1@24.355,-7.509 | length 44.1
  Top Layer w0.12: 20.5,-14.8 20.5,-13.5 21.4,-12.6 25.3,-12.6 25.8,-12.1 27.2,-12.1 27.7,-12.6 28.5,-12.6 30.5,-10.6 53,-10.6 53.75,-9.85 53.75,-4.75 54,-4.5 IC1.U5@54,-4
  Bottom Layer w0.178: J3.14@24.35,-9.135 pad.1@24.35,-7.47
EDIN00P: IC1.T5 J3.16 pad.1@23.555,-7.509 | length 44.1
  Top Layer w0.076: IC1.T5@54,-3.5 54.25,-3.75 54.25,-4.25
  Top Layer w0.12: 21.1,-14.8 21.1,-14 21.8,-13.3 29.2,-13.3 30.675,-11.825 52.775,-11.825 54.25,-10.35 54.25,-4.25
  Bottom Layer w0.178: J3.16@23.55,-9.135 pad.1@23.55,-7.47
EDIN02N: IC1.U7 J3.32 pad.1@17.155,-7.509 | length 41.9
  Top Layer w0.12: 24.1,-14.464 24.117,-14.447 24.117,-14.183 24.3,-14 30.5,-14 31.1,-13.4 32.8,-13.4 33.4,-14 34.8,-14 35.4,-13.4 36.9,-13.4 37.5,-14 51.6,-14 54.75,-10.85 54.75,-4.25 IC1.U7@55,-4
  Bottom Layer w0.178: J3.32@17.15,-9.135 pad.1@17.15,-7.47
EDIN02P: IC1.T7 J3.34 pad.1@16.355,-7.509 | length 41.9
  Top Layer w0.076: IC1.T7@55,-3.5 55.25,-3.75 55.25,-4.25
  Top Layer w0.12: 24.7,-14.464 24.731,-14.495 24.731,-14.73 24.802,-14.8 51.8,-14.8 55.25,-11.35 55.25,-4.25
  Bottom Layer w0.178: J3.34@16.35,-9.135 pad.1@16.35,-7.47
EDIN10N: IC1.U11 J4.14 | length 17.6
  Top Layer w0.12: IC1.U11@57,-4 57,-4.6 56.5,-5.1 56.5,-12.6 57.8,-13.9 63.6,-13.9 64.1,-14.4 64.1,-14.8
EDIN10P: IC1.T11 J4.16 | length 17.6
  Top Layer w0.076: IC1.T11@57,-3.5 57.25,-3.75 57.25,-4.25
  Top Layer w0.12: 57.25,-4.25 57.25,-5 57,-5.25 57,-11.3 59,-13.3 63.9,-13.3 64.7,-14.1 64.7,-14.8
EDIN12N: IC1.U13 J4.34 | length 19.8
  Top Layer w0.12: IC1.U13@58,-4 58,-10.75 59.25,-12 60.2,-12 60.8,-11.4 61.7,-11.4 62.3,-12 66.4,-12 68.3,-13.9 68.3,-14.8
EDIN12P: IC1.T13 J4.32 | length 19.7
  Top Layer w0.076: 57.75,-4.25 57.75,-3.75 IC1.T13@58,-3.5
  Top Layer w0.12: 57.75,-4.25 57.75,-5.25 57.5,-5.5 57.5,-11 59.1,-12.6 65.9,-12.6 67.7,-14.4 67.7,-14.8
EDIN20N: IC1.P17 J5.14 | length 54.4
  Top Layer w0.12: IC1.P17@60,-2.5 60.25,-2.75 60.75,-2.75 66.3,-8.3 73.8,-8.3 79.75,-14.25 85.55,-14.25 86.9,-15.6 88.4,-15.6 88.8,-15.2 90.6,-15.2 91,-15.6 93,-15.6 93.5,-15.1 94.9,-15.1 95.4,-15.6 107.3,-15.6 107.7,-15.2 107.7,-14.8
EDIN20P: IC1.P16 J5.16 | length 54.4
  Top Layer w0.076: IC1.P16@59.5,-2.5 59.75,-2.25 60.25,-2.25
  Top Layer w0.12: 60.25,-2.25 61,-2.25 66.65,-7.9 74.65,-7.9 80.25,-13.5 86.9,-13.5 87.5,-14.1 108.1,-14.1 108.3,-14.3 108.3,-14.8
EDIN22N: IC1.M17 J5.32 | length 58.7
  Top Layer w0.12: IC1.M17@60,-1.5 60.25,-1.75 61.25,-1.75 66.8,-7.3 75.3,-7.3 80.7,-12.7 89.4,-12.7 89.9,-13.2 91.4,-13.2 91.9,-12.7 93.5,-12.7 94,-13.2 95.3,-13.2 95.8,-12.7 96.9,-12.7 97.4,-13.2 98.5,-13.2 99,-12.7 100.1,-12.7 100.5,-13.1 101.8,-13.1 102.2,-12.7 109.7,-12.7 111.3,-14.3 111.3,-14.8
EDIN22P: IC1.M16 J5.34 | length 58.6
  Top Layer w0.076: IC1.M16@59.5,-1.5 59.75,-1.25 60.25,-1.25
  Top Layer w0.12: 60.25,-1.25 61.5,-1.25 66.85,-6.6 75.85,-6.6 81.25,-12 110,-12 111.9,-13.9 111.9,-14.8
EDIN30N: .14 IC1.H17 | length 58.3
  Top Layer w0.12: IC1.H17@60,0.5 61.3,0.5 62.4,1.6 62.4,3.6 66.3,7.5 75.5,7.5 80.6,12.6 109.3,12.6 110.7,14 110.7,14.8
EDIN30P: .16 IC1.H16 | length 58.3
  Top Layer w0.076: IC1.H16@59.5,0.5 59.75,0.75 60.25,0.75
  Top Layer w0.12: 60.25,0.75 60.5,1 60.9,1 61.8,1.9 61.8,4.5 65.3,8 74.2,8 79.5,13.3 109,13.3 110.1,14.4 110.1,14.8
EDIN32N: .32 IC1.F17 | length 54.7
  Top Layer w0.12: IC1.F17@60,1.5 60.7,1.5 61.3,2.1 61.3,5.1 64.7,8.5 72.9,8.5 78.4,14 106.8,14 107.1,14.3 107.1,14.8
EDIN32P: .34 IC1.F16 | length 54.7
  Top Layer w0.076: IC1.F16@59.5,1.5 59.75,1.75 60.25,1.75
  Top Layer w0.12: 60.25,1.75 60.8,2.3 60.8,6 63.8,9 71.9,9 77.7,14.8 106.5,14.8
EDIN40N: IC1.A14 J2.14 | length 15.7
  Top Layer w0.076: IC1.A14@58.5,4 58.5,4.75
  Top Layer w0.12: 58.5,4.75 62.6,8.85 62.6,11.3 64.3,13 66.6,13 67.1,13.5 67.1,14.8
EDIN40P: IC1.B14 J2.16 | length 15.7
  Top Layer w0.076: 58.25,4.2 58.25,3.75 IC1.B14@58.5,3.5
  Top Layer w0.12: 58.25,4.2 58,4.45 58,5.25 61.9,9.15 61.9,11.4 64.3,13.8 65.5,13.8 66.5,14.8
EDIN42N: IC1.A12 J2.32 | length 15.3
  Top Layer w0.12: IC1.A12@57.5,4 57.5,6.6 58.2,7.3 58.2,8.6 57.5,9.3 57.5,10.75 58.25,11.5 60.7,11.5 63.5,14.3 63.5,14.8
EDIN42P: IC1.B12 J2.34 | length 15.3
  Top Layer w0.076: 57.25,4.2 57.25,3.75 IC1.B12@57.5,3.5
  Top Layer w0.12: 57.25,4.2 57,4.45 57,11.25 57.95,12.2 60.3,12.2 62.9,14.8
EDIN50N: IC1.A10 J1.14 | length 39.6
  Top Layer w0.12: 23.5,14.8 24.2,15.5 47.6,15.5 56.5,6.6 IC1.A10@56.5,4
EDIN50P: IC1.B10 J1.16 | length 39.6
  Top Layer w0.076: 56.25,4.25 56.25,3.75 IC1.B10@56.5,3.5
  Top Layer w0.12: 22.9,14.8 22.9,14.4 23.2,14.1 47.7,14.1 56,5.8 56,4.5 56.25,4.25
EDIN52N: IC1.A8 J1.32 | length 41.4
  Top Layer w0.12: 19.9,14.8 19.9,15.1 20.2,15.4 21.3,15.4 23.2,13.5 47.1,13.5 55.5,5.1 IC1.A8@55.5,4
EDIN52P: IC1.B8 J1.34 | length 41.4
  Top Layer w0.076: 55.25,4.25 55.25,3.75 IC1.B8@55.5,3.5
  Top Layer w0.12: 19.3,14.8 19.3,14.4 20.8,12.9 46.6,12.9 55.25,4.25
EDOUT00N: IC1.R5 J3.10 pad.1@25.955,-7.509 pad.1@54.25,-3.25 | length 42.5
  Top Layer w0.13: IC1.R5@54,-3 pad.1@54.25,-3.25
  M1 w0.12: 19.9,-14.8 19.9,-14.2 20.3,-13.8 28.6,-13.8 29,-14.2 29.8,-14.2 30.2,-13.8 39.9,-13.8 48.9,-4.8 53.75,-4.8 54.25,-4.3 pad.1@54.25,-3.25
  Bottom Layer w0.178: J3.10@25.95,-9.135 pad.1@25.95,-7.47
EDOUT00P: IC1.P5 J3.08 pad.1@26.755,-7.509 pad.1@54.25,-2.75 | length 42.5
  Top Layer w0.13: IC1.P5@54,-2.5 pad.1@54.25,-2.75
  M1 w0.12: 19.3,-14.8 19.3,-13.95 20.25,-13 39.75,-13 48.75,-4 53,-4 pad.1@54.25,-2.75
  Bottom Layer w0.178: J3.08@26.75,-9.135 pad.1@26.75,-7.47
EDOUT02N: IC1.R7 J4.08 pad.1@55.25,-3.25 | length 17.9
  Top Layer w0.13: IC1.R7@55,-3 pad.1@55.25,-3.25
  M1 w0.13: pad.1@55.25,-3.25 55.25,-12 57.45,-14.2 62.3,-14.2 62.9,-14.8
EDOUT02P: IC1.P7 J4.10 pad.1@55.25,-2.75 | length 17.9
  Top Layer w0.13: IC1.P7@55,-2.5 pad.1@55.25,-2.75
  M1 w0.12: pad.1@55.25,-2.75 56.15,-3.65 56.15,-10.6 59.05,-13.5 62.65,-13.5 63.5,-14.35 63.5,-14.8
EDOUT10N: IC1.R9 J5.08 pad.1@56.25,-3.25 | length 59.5
  Top Layer w0.13: IC1.R9@56,-3 pad.1@56.25,-3.25
  M1 w0.12: pad.1@56.25,-3.25 56.75,-3.25 57.25,-3.75 57.25,-9.2 60.55,-12.5 67.7,-12.5 69.4,-14.2 101.5,-14.2 102.4,-15.1 103.4,-15.1 104.3,-14.2 106.2,-14.2 106.5,-14.5 106.5,-14.8
EDOUT10P: IC1.P9 J5.10 pad.1@56.25,-2.75 | length 59.5
  Top Layer w0.13: IC1.P9@56,-2.5 pad.1@56.25,-2.75
  M1 w0.12: pad.1@56.25,-2.75 56.75,-2.75 57.75,-3.75 57.75,-8.7 60.75,-11.7 68.05,-11.7 69.85,-13.5 106.5,-13.5 107.1,-14.1 107.1,-14.8
EDOUT20N: .08 IC1.C13 pad.1@57.75,3.25 | length 60.8
  Top Layer w0.13: pad.1@57.75,3.25 IC1.C13@58,3
  M1 w0.12: pad.1@57.75,3.25 57.75,4.45 60.8,7.5 74.3,7.5 80.1,13.3 103.6,13.3 104.2,12.7 106.1,12.7 106.7,13.3 111,13.3 111.9,14.2 111.9,14.8
EDOUT20P: .10 IC1.D13 pad.1@57.75,2.75 | length 60.8
  Top Layer w0.13: pad.1@57.75,2.75 IC1.D13@58,2.5
  M1 w0.12: pad.1@57.75,2.75 57.25,3.25 57.25,4.85 60.4,8 73.8,8 79.9,14.1 110.6,14.1 111.3,14.8
EDOUT22N: IC1.C11 J2.08 pad.1@56.75,3.25 | length 21.5
  Top Layer w0.13: pad.1@56.75,3.25 IC1.C11@57,3
  M1 w0.12: pad.1@56.75,3.25 56.75,9.85 60,13.1 61.3,13.1 61.9,12.5 63.7,12.5 64.3,13.1 67.3,13.1 68.3,14.1 68.3,14.8
EDOUT22P: IC1.D11 J2.10 pad.1@56.75,2.75 | length 21.5
  Top Layer w0.13: pad.1@56.75,2.75 IC1.D11@57,2.5
  M1 w0.12: pad.1@56.75,2.75 56.25,3.25 56.25,10.35 59.8,13.9 66.8,13.9 67.7,14.8
EDOUT23N: IC1.C10
EDOUT23P: IC1.D10
EDOUT30N: J1.08 pad.1@55.75,3.25
EDOUT30P: J1.10 pad.1@55.75,2.75
FEC_MODE: IC1.P3 IC4.P3 pad.1@72.25,-2.75 R101.1 | length 30.4
  Top Layer w0.076: v1(50.5,-2.75) 51.25,-2.75 52.75,-2.75 IC1.P3@53,-2.5
  Top Layer w0.13: IC4.P3@72,-2.5 pad.1@72.25,-2.75
  Bottom Layer w0.102: v1(50.5,-2.75) 49.55,-3.7 R101.1@49.5,-3.7 49.5,-4.95 49.8,-5.25 71.25,-5.25 72.25,-4.25 pad.1@72.25,-2.75
GND: .06 .12 .18 .24 .29 .30 .35 .36 .G1 .G2 .G3 .G4 C1.2 C2.2 C33.2 C34.2 C35.2 C36.2 C105.2 C106.2 C107.2 C108.2 C109.2 C111.2 C112.2 C113.2 C114.2 C115.2 C116.2 C117.2 C118.2 C119.2 C120.2 C121.2 C122.2 C123.2 C124.2 C125.2 C126.2 C127.2 C128.2 C129.2 C130.2 C131.2 C132.2 C133.2 C134.2 C135.2 C138.2 C139.2 C140.2 C141.2 C150.2 C151.2 C152.2 C153.2 C154.2 C155.2 C160.2 C162.2 C163.2 C164.2 C165.2 C166.2 C167.2 C168.2 C169.2 C218.2 C219.2 C220.2 C221.2 C222.2 C223.2 C224.2 C225.2 C226.2 C227.2 C228.2 C229.2 C230.2 C231.2 C232.2 C233.2 D1.2 IC1.E8 IC1.F1 IC1.F2 IC1.F4 IC1.F8 IC1.G2 IC1.G4 IC1.G6 IC1.G7 IC1.G8 IC1.G9 IC1.G10 IC1.G11 IC1.G12 IC1.G13 IC1.H2 IC1.H5 IC1.H6 IC1.H7 IC1.H8 IC1.H9 IC1.H10 IC1.H11 IC1.H12 IC1.H13 IC1.J1 IC1.J2 IC1.J12 IC1.J13 IC1.K1 IC1.K2 IC1.L2 IC1.M2 IC1.N1 IC1.N2 IC2.5 IC2.6 IC2.11 IC2.12 IC2.17 IC2.18 IC2.23 IC2.24 IC2.29 IC2.30 IC2.34 IC2.35 IC2.36 IC3.D4 IC3.D5 IC3.D6 IC3.D7 IC3.D8 IC3.E4 IC3.E5 IC3.E6 IC3.E7 IC3.E8 IC3.F4 IC3.F5 IC3.F6 IC3.F7 IC3.G5 IC3.G6 IC3.G7 IC3.G12 IC3.G13 IC3.G14 IC3.H5 IC3.H6 IC3.H7 IC3.H12 IC3.H13 IC3.H14 IC3.J5 IC3.J6 IC3.J12 IC3.K4 IC3.K5 IC3.K6 IC3.K12 IC3.L4 IC3.L5 IC3.L6 IC3.L7 IC3.L8 IC3.L9 IC3.L10 IC3.L11 IC3.M13 IC4.E8 IC4.E9 IC4.F1 IC4.F2 IC4.F4 IC4.F8 IC4.F9 IC4.G2 IC4.G4 IC4.G6 IC4.G7 IC4.G8 IC4.G9 IC4.G10 IC4.G11 IC4.G12 IC4.G13 IC4.H2 IC4.H5 IC4.H6 IC4.H7 IC4.H8 IC4.H9 IC4.H10 IC4.H11 IC4.H12 IC4.H13 IC4.J1 IC4.J2 IC4.J12 IC4.J13 IC4.K1 IC4.K2 IC4.K5 IC4.L2 IC4.M2 IC4.N1 IC4.N2 IC5.6 IC5.9 IC6.6 IC6.9 IC7.6 IC7.9 J1.06 J1.12 J1.18 J1.24 J1.29 J1.30 J1.35 J1.36 J1.G1 J1.G2 J1.G3 J1.G4 J2.06 J2.12 J2.18 J2.24 J2.29 J2.30 J2.35 J2.36 J2.G1 J2.G2 J2.G3 J2.G4 J3.06 J3.12 J3.18 J3.24 J3.29 J3.30 J3.35 J3.36 J3.37 J3.39 J3.G1 J3.G2 J3.G3 J3.G4 J4.06 J4.12 J4.18 J4.24 J4.29 J4.30 J4.35 J4.36 J4.37 J4.G1 J4.G2 J4.G3 J4.G4 J5.06 J5.12 J5.18 J5.24 J5.29 J5.30 J5.35 J5.36 J5.39 J5.G1 J5.G2 J5.G3 J5.G4 J6.2 J6.3 J6.4 J6.5 J8.2 J8.3 J8.4 J8.5 P2.5 P2.6 P2.7 P2.8 P2.9 P3.5 P3.6 P3.7 P3.8 P3.9 P11.5 P11.6 P11.7 P11.8 P11.9 P14.5 P14.6 P14.7 P14.8 P14.9 P15.5 P15.6 P15.7 P15.8 P15.9 pad.1@13.955,-13.239 pad.1@14.755,-13.239 pad.1@15.545,-10.761 pad.1@15.555,-13.239 pad.1@17.945,-10.761 pad.1@17.955,-13.239 pad.1@20.345,-10.761 pad.1@22.745,-10.761 pad.1@25.145,-10.761 pad.1@25.955,-13.239 pad.1@27.5,-1.8 pad.1@27.5,-3 pad.1@27.6,2.8 pad.1@27.6,-0.35 pad.1@27.45,0.6 pad.1@27.45,1.8 pad.1@27.545,-10.761 pad.1@28.4,-1.8 pad.1@28.4,-3 pad.1@28.5,0.6 pad.1@28.5,1.8 pad.1@28.5,3 pad.1@28.5,-0.6 pad.1@51.35,2.9 pad.1@51.75,1.75 pad.1@51.75,-0.25 pad.1@52.25,0.25 pad.1@52.25,0.75 pad.1@52.25,1.25 pad.1@52.25,-0.25 pad.1@52.25,-0.75 pad.1@52.25,-1.25 pad.1@52.25,-1.75 pad.1@52.75,-0.25 pad.1@52.75,-0.75 pad.1@52.75,-1.75 pad.1@53.25,0.75 pad.1@53.75,0.75 pad.1@53.75,1.25 pad.1@53.75,-2.75 pad.1@54.25,-1.75 pad.1@54.75,0.25 pad.1@54.75,0.75 pad.1@55.25,0.25 pad.1@55.25,0.75 pad.1@55.25,1.25 pad.1@55.25,-1.75 pad.1@55.75,0.25 pad.1@55.75,0.75 pad.1@55.75,1.25 pad.1@55.75,-2.75 pad.1@56.25,2.75 pad.1@56.25,-1.75 pad.1@56.75,0.75 pad.1@56.75,1.25 pad.1@57.25,0.75 pad.1@57.25,1.25 pad.1@57.25,2.75 pad.1@57.25,-2.75 pad.1@57.75,0.75 pad.1@57.75,1.25 pad.1@57.75,-0.25 pad.1@58.25,0.25 pad.1@58.25,0.75 pad.1@58.25,1.25 pad.1@58.25,2.75 pad.1@58.25,3.25 pad.1@58.25,-1.75 pad.1@58.75,3.25 pad.1@58.75,-1.75 pad.1@59.25,0.25 pad.1@59.25,3.75 pad.1@59.25,4.25 pad.1@59.25,-0.25 pad.1@59.25,-0.75 pad.1@59.25,-1.25 pad.1@59.25,-3.25 pad.1@59.75,3.75 pad.1@59.75,-0.25 pad.1@59.248,3.238 pad.1@59.248,-3.771 pad.1@68.325,1.382 pad.1@70.75,1.75 pad.1@70.75,-0.25 pad.1@70.75,-0.75 pad.1@70.75,-1.75 pad.1@71.25,0.75 pad.1@71.25,1.25 pad.1@71.25,1.75 pad.1@71.25,-0.25 pad.1@71.25,-0.75 pad.1@71.25,-1.75 pad.1@71.75,-0.75 pad.1@71.75,-1.75 pad.1@72.75,1.25 pad.1@72.75,1.75 pad.1@72.75,-3.25 pad.1@73.25,0.25 pad.1@73.25,0.75 pad.1@73.25,-0.75 pad.1@73.25,-3.75 pad.1@73.75,0.75 pad.1@73.75,1.25 pad.1@73.75,-3.25 pad.1@74.25,1.25 pad.1@74.25,3.75 pad.1@74.75,0.75 pad.1@74.75,1.25 pad.1@74.75,3.25 pad.1@74.75,-2.25 pad.1@74.255,-3.755 pad.1@75.25,0.25 pad.1@75.25,0.75 pad.1@75.25,1.25 pad.1@75.25,3.75 pad.1@75.25,-0.75 pad.1@75.75,0.75 pad.1@75.75,1.25 pad.1@75.75,3.25 pad.1@75.75,-2.75 pad.1@75.75,-3.25 pad.1@76.25,0.75 pad.1@76.25,1.25 pad.1@76.25,3.75 pad.1@76.25,-3.75 pad.1@76.75,0.25 pad.1@76.75,0.75 pad.1@76.75,1.25 pad.1@76.75,3.25 pad.1@76.75,-2.75 pad.1@76.75,-3.25 pad.1@77.25,0.25 pad.1@77.25,0.75 pad.1@77.25,1.25 pad.1@77.25,3.75 pad.1@77.25,-3.75 pad.1@77.75,1.75 pad.1@77.75,3.25 pad.1@77.75,-2.75 pad.1@78.25,0.75 pad.1@78.25,1.25 pad.1@78.25,-1.75 pad.1@78.25,-2.25 pad.1@78.75,0.25 pad.1@78.75,1.25 pad.1@78.75,-1.25 pad.1@78.75,-2.25 pad.1@86.8,-4 pad.1@87.6,0 pad.1@87.6,0.8 pad.1@87.6,-0.8 pad.1@87.6,-1.6 pad.1@87.6,-2.4 pad.1@87.6,-3.2 pad.1@88.4,0.8 pad.1@88.4,1.6 pad.1@88.4,2.4 pad.1@89.2,1.6 pad.1@89.2,2.4 pad.1@89.2,-4 pad.1@90,0 pad.1@90,0.8 pad.1@90,1.6 pad.1@90,2.4 pad.1@90,-4 pad.1@90.8,2.4 pad.1@90.8,-4 pad.1@90.8,-4.8 pad.1@90.8,-5.6 pad.1@91.6,0.8 pad.1@91.6,1.6 pad.1@91.6,2.4 pad.1@91.6,-4 pad.1@91.6,-4.8 pad.1@91.6,-5.6 pad.1@92.4,0.8 pad.1@92.4,1.6 pad.1@92.4,2.4 pad.1@92.4,3.2 pad.1@93.2,0 pad.1@93.2,0.8 pad.1@93.2,1.6 pad.1@93.2,2.4 pad.1@93.2,3.2 pad.1@94,0 pad.1@94,0.8 pad.1@94,1.6 pad.1@94,2.4 pad.1@94,3.2 pad.1@119.1,9.2 pad.1@127.1,9.2 pad.M Q1.2 Q2.2 Q3.2 Q4.2 Q5.2 R7.2 R12.2 R19.1 R21.1 R23.1 R26.1 R28.1 R112.2 R115.2 R118.1 R120.1 R122.1 R123.2 R126.2 R134.1 R146.1 R233.2 R234.2 R235.2 R236.2 RT1.1 RT2.1 | length 150
  Top Layer w0.076: pad.1@55.25,1.25 55.25,1.5 ; IC1.F8@55.5,1.5 55.25,1.5 ; IC1.E8@55.5,2 55.25,1.75 55.25,1.5 ; pad.1@74.25,1.25 74.25,1.5 ; IC4.F8@74.5,1.5 74.25,1.5 ; IC4.E8@74.5,2 74.25,1.75 74.25,1.5 ; pad.1@74.75,1.25 74.75,1.5 ; IC4.F9@75,1.5 74.75,1.5 ; IC4.E9@75,2 74.75,1.75 74.75,1.5
  Top Layer w0.102: v1(5,18.5) R233.2@5.8,18.5 ; R234.2@39.6,-19 v1(40.4,-19) ; C151.2@45.3,5.6 C150.2@46.6,5.6 C109.2@47.9,5.6 ; v1(47.2,1.7) 47.6,2.1 RT1.1@47.95,2.1 ; v1(47.9,6.5) C109.2@47.9,5.6 ; C141.2@49.2,5.6 C109.2@47.9,5.6 ; v1(51.4,16.8) 51.417,16.817 D1.2@51.417,17.495 ; pad.1@68.3,1.4 68.35,1.35 Q2.2@68.35,0.85 ; 81.6,-5.6 81.6,-0.8 v1(81.6,-0.05) 81.95,-0.05 82.8,0.8 R112.2@82.8,1.2 ; v1(89.9,18.1) R235.2@90.7,18.1 ; 119.8,20.7 119.8,23.1 ; v1(124.1,-21.8) R236.2@124.1,-21
  Top Layer w0.13: pad.1@51.75,-0.25 IC1.J1@52,0 ; pad.1@51.75,1.75 IC1.F1@52,1.5 ; IC1.N1@52,-2 pad.1@52.25,-1.75 ; IC1.K1@52,-0.5 pad.1@52.25,-0.25 ; pad.1@52.25,-1.25 IC1.M2@52.5,-1.5 ; pad.1@52.25,-0.75 IC1.K2@52.5,-0.5 ; pad.1@52.25,0.25 IC1.H2@52.5,0.5 ; pad.1@52.25,0.75 IC1.G2@52.5,1 ; pad.1@52.25,1.25 IC1.F2@52.5,1.5 ; IC1.N2@52.5,-2 pad.1@52.75,-1.75 ; IC1.L2@52.5,-1 pad.1@52.75,-0.75 ; IC1.J2@52.5,0 pad.1@52.75,-0.25 ; pad.1@53.25,0.75 IC1.G4@53.5,1 ; IC1.F4@53.5,1.5 pad.1@53.75,1.25 ; pad.1@53.75,0.75 IC1.H5@54,0.5 ; IC1.H6@54.5,0.5 pad.1@54.75,0.25 ; IC1.G6@54.5,1 pad.1@54.75,0.75 ; IC1.H7@55,0.5 pad.1@55.25,0.25 ; IC1.G7@55,1 pad.1@55.25,0.75 ; pad.1@55.25,1.25 IC1.G8@55.5,1 ; IC1.H8@55.5,0.5 pad.1@55.75,0.75 ; pad.1@55.75,0.25 IC1.H9@56,0.5 ; pad.1@55.75,1.25 IC1.G9@56,1 ; IC1.H10@56.5,0.5 pad.1@56.75,0.75 ; IC1.G10@56.5,1 pad.1@56.75,1.25 ; IC1.H11@57,0.5 pad.1@57.25,0.75 ; IC1.G11@57,1 pad.1@57.25,1.25 ; IC1.J12@57.5,0 pad.1@57.75,-0.25 ; IC1.H12@57.5,0.5 pad.1@57.75,0.75 ; IC1.G12@57.5,1 pad.1@57.75,1.25 ; IC1.J13@58,0 pad.1@58.25,0.25 ; IC1.H13@58,0.5 pad.1@58.25,0.75 ; IC1.G13@58,1 pad.1@58.25,1.25 ; pad.1@70.75,-1.75 IC4.N1@71,-2 ; pad.1@70.75,-0.75 IC4.K1@71,-0.5 ; pad.1@70.75,-0.25 IC4.J1@71,0 ; pad.1@70.75,1.75 IC4.F1@71,1.5 ; pad.1@71.25,-1.75 IC4.M2@71.5,-1.5 ; pad.1@71.25,-0.75 IC4.K2@71.5,-0.5 ; pad.1@71.25,-0.25 IC4.J2@71.5,0 ; pad.1@71.25,0.75 IC4.H2@71.5,0.5 ; pad.1@71.25,1.25 IC4.G2@71.5,1 ; pad.1@71.25,1.75 IC4.F2@71.5,1.5 ; IC4.N2@71.5,-2 pad.1@71.75,-1.75 ; IC4.L2@71.5,-1 pad.1@71.75,-0.75 ; IC4.G4@72.5,1 pad.1@72.75,1.25 ; IC4.F4@72.5,1.5 pad.1@72.75,1.75 ; IC4.K5@73,-0.5 pad.1@73.25,-0.75 ; IC4.H5@73,0.5 pad.1@73.25,0.25 ; pad.1@73.25,0.75 IC4.H6@73.5,0.5 ; IC4.G6@73.5,1 pad.1@73.75,1.25 ; pad.1@73.75,0.75 IC4.H7@74,0.5 ; IC4.G7@74,1 pad.1@74.25,1.25 ; IC4.H8@74.5,0.5 pad.1@74.75,0.75 ; IC4.G8@74.5,1 pad.1@74.75,1.25 ; IC4.H9@75,0.5 pad.1@75.25,0.75 ; IC4.G9@75,1 pad.1@75.25,1.25 ; IC4.H10@75.5,0.5 pad.1@75.75,0.75 ; IC4.G10@75.5,1 pad.1@75.75,1.25 ; IC4.H11@76,0.5 pad.1@76.25,0.75 ; IC4.G11@76,1 pad.1@76.25,1.25 ; IC4.J12@76.5,0 pad.1@76.75,0.25 ; IC4.H12@76.5,0.5 pad.1@76.75,0.75 ; IC4.G12@76.5,1 pad.1@76.75,1.25 ; IC4.J13@77,0 pad.1@77.25,0.25 ; IC4.H13@77,0.5 pad.1@77.25,0.75 ; IC4.G13@77,1 pad.1@77.25,1.25 ; pad.1@86.8,-4 IC3.M13@87.2,-4.4 ; pad.1@87.6,-3.2 IC3.L11@88,-2.8 ; pad.1@87.6,-2.4 IC3.L10@88,-2 ; pad.1@87.6,-1.6 IC3.L9@88,-1.2 ; pad.1@87.6,-0.8 IC3.L8@88,-0.4 ; pad.1@87.6,0 IC3.L7@88,0.4 ; pad.1@87.6,0.8 IC3.L6@88,1.2 ; IC3.L5@88,2 pad.1@88.4,1.6 ; IC3.L4@88,2.8 pad.1@88.4,2.4 ; pad.1@88.4,0.8 IC3.K6@88.8,1.2 ; IC3.K12@88.8,-3.6 pad.1@89.2,-4 ; IC3.K5@88.8,2 pad.1@89.2,1.6 ; IC3.K4@88.8,2.8 pad.1@89.2,2.4 ; IC3.J12@89.6,-3.6 pad.1@90,-4 ; IC3.J6@89.6,1.2 pad.1@90,1.6 ; IC3.J5@89.6,2 pad.1@90,2.4 ; pad.1@90,0 IC3.H7@90.4,0.4 ; pad.1@90,0.8 IC3.H6@90.4,1.2 ; IC3.H14@90.4,-5.2 pad.1@90.8,-5.6 ; IC3.H13@90.4,-4.4 pad.1@90.8,-4.8 ; IC3.H12@90.4,-3.6 pad.1@90.8,-4 ; IC3.H5@90.4,2 pad.1@90.8,2.4 ; IC3.G14@91.2,-5.2 pad.1@91.6,-5.6 ; IC3.G13@91.2,-4.4 pad.1@91.6,-4.8 ; IC3.G12@91.2,-3.6 pad.1@91.6,-4 ; IC3.G7@91.2,0.4 pad.1@91.6,0.8 ; IC3.G6@91.2,1.2 pad.1@91.6,1.6 ; IC3.G5@91.2,2 pad.1@91.6,2.4 ; IC3.F7@92,0.4 pad.1@92.4,0.8 ; IC3.F6@92,1.2 pad.1@92.4,1.6 ; IC3.F5@92,2 pad.1@92.4,2.4 ; IC3.F4@92,2.8 pad.1@92.4,3.2 ; IC3.E8@92.8,-0.4 pad.1@93.2,0 ; IC3.E7@92.8,0.4 pad.1@93.2,0.8 ; IC3.E6@92.8,1.2 pad.1@93.2,1.6 ; IC3.E5@92.8,2 pad.1@93.2,2.4 ; IC3.E4@92.8,2.8 pad.1@93.2,3.2 ; IC3.D8@93.6,-0.4 pad.1@94,0 ; IC3.D7@93.6,0.4 pad.1@94,0.8 ; IC3.D6@93.6,1.2 pad.1@94,1.6 ; IC3.D5@93.6,2 pad.1@94,2.4 ; IC3.D4@93.6,2.8 pad.1@94,3.2
  Top Layer w0.2: IC2.6@26.67,-3 pad.1@27.5,-3 ; IC2.12@26.67,-1.8 pad.1@27.5,-1.8 ; IC2.18@26.67,-0.6 27.35,-0.6 pad.1@27.6,-0.35 ; IC2.24@26.67,0.6 pad.1@27.45,0.6 ; IC2.30@26.67,1.8 pad.1@27.45,1.8 ; IC2.34@26.67,2.6 27.4,2.6 pad.1@27.6,2.8 27.4,3 IC2.36@26.67,3 ; pad.1@28.4,-3 IC2.5@29.33,-3 ; pad.1@28.4,-1.8 IC2.11@29.33,-1.8 ; pad.1@28.5,-0.6 IC2.17@29.33,-0.6 ; pad.1@28.5,0.6 IC2.23@29.33,0.6 ; pad.1@28.5,1.8 IC2.29@29.33,1.8 ; pad.1@28.5,3 IC2.35@29.33,3 ; R123.2@43,-5.5 v1(43.6,-5.5) ; R12.2@43,-3.7 v1(43.6,-3.7)
  Top Layer w0.25: v1(47.1,-3.8) 47.129,-3.829 47.129,-4.661 Q1.2@47.168,-4.7
  Top Layer w0.3: IC7.9@39.75,-4.6 40,-4.35 IC7.6@40,-3.7 ; IC6.6@40,6 40,5.35 39.875,5.225 39.9,5.2 R115.2@41.4,5.2 ; IC5.6@82,3.9 82,4.55 IC5.9@82.25,4.8
  Bottom Layer w0.102: R122.1@45.2,1.7 R120.1@46.5,1.7 v1(47.2,1.7) R134.1@49.2,1.7 ; R146.1@51.05,3.7 51.05,3.2 pad.1@51.35,2.9 ; v1(84.8,0.4) RT2.1@84.8,0.95 ; 87.4,1.6 87.4,1 pad.1@87.6,0.8 ; 89.8,4.5 89.8,2.6 pad.1@90,2.4
  Bottom Layer w0.12: J3.36@15.55,-9.135 J3.36@15.576,-9.161
  Bottom Layer w0.2: 81.6,-8.2 81.6,-0.8 v1(81.6,-0.05) ; R126.2@82.7,7 v1(82.7,7.7) ; v1(86.3,7.7) 88.7,7.7
  Bottom Layer w0.254: J3.39@13.95,-14.865 pad.1@13.95,-13.2 ; J3.37@14.75,-14.865 pad.1@14.75,-13.2 ; J3.35@15.55,-14.865 pad.1@15.55,-13.2 ; pad.1@15.55,-10.8 J3.36@15.55,-9.135 ; J3.29@17.95,-14.865 pad.1@17.95,-13.2 ; pad.1@17.95,-10.8 J3.30@17.95,-9.135 ; pad.1@20.35,-10.8 J3.24@20.35,-9.135 ; pad.1@22.75,-10.8 J3.18@22.75,-9.135 ; pad.1@25.15,-10.8 J3.12@25.15,-9.135 ; 25.95,-14.865 pad.1@25.95,-13.2 ; pad.1@27.55,-10.8 J3.06@27.55,-9.135
  Bottom Layer w0.3: pad.1@51.35,2.9 51.79,2.9 C119.2@51.94,2.75 C119.2@51.85,2.75 ; C125.2@52.09,-2.3 52.09,-1.91 pad.1@52.25,-1.75 ; pad.1@52.75,-0.25 C116.2@52.75,0.19 ; C117.2@53.75,-1.81 53.81,-1.75 pad.1@54.25,-1.75 ; C126.2@53.75,0.31 pad.1@53.75,0.75 ; C114.2@54.75,-1.81 54.81,-1.75 pad.1@55.25,-1.75 ; C122.2@55.75,-1.81 55.81,-1.75 pad.1@56.25,-1.75 ; C120.2@56.25,1.06 56.56,1.06 pad.1@56.75,1.25 ; C118.2@56.75,-2.41 56.91,-2.41 pad.1@57.25,-2.75 ; 57.56,0.25 57.75,0.06 pad.1@57.75,-0.25 ; pad.1@58.25,-1.75 58.25,-2.19 C123.2@58.31,-2.25 ; pad.1@58.25,0.75 58.31,0.81 C124.2@58.75,0.81 ; pad.1@58.75,-1.75 C115.2@58.75,-1.31 ; pad.1@59.25,-3.25 C121.2@59.25,-2.81 ; C113.2@59.75,-0.7 C113.2@59.75,-0.69 pad.1@59.75,-0.25 ; pad.1@70.75,-0.75 70.75,-1.06 C130.2@70.94,-1.25 ; pad.1@70.75,1.75 70.75,2.06 C133.2@70.94,2.25 ; pad.1@71.25,-1.75 71.25,-2.06 C132.2@71.44,-2.25 ; pad.1@71.25,-0.25 71.25,0.16 C164.2@71.34,0.25 ; C163.2@72.75,0.31 73.19,0.31 pad.1@73.25,0.25 ; pad.1@72.75,1.25 73.06,1.25 C167.2@73.25,1.44 ; C168.2@73.19,-1.25 73.19,-0.81 pad.1@73.25,-0.75 ; pad.1@74.25,1.25 C129.2@74.25,0.81 C129.2@74.26,0.8 ; pad.1@74.75,-2.25 C128.2@74.75,-1.81 ; pad.1@75.75,-2.75 C134.2@75.75,-2.31 ; C131.2@75.75,0.31 pad.1@75.75,0.75 ; pad.1@76.75,-2.75 C165.2@76.75,-2.31 ; pad.1@77.25,0.25 77.66,0.25 C166.2@77.8,0.11 ; pad.1@77.75,-2.75 C135.2@77.75,-2.31 ; C155.2@82.8,1.2 v1(83.55,1.2) ; C105.2@85.5,7.7 v1(86.3,7.7) 86.3,6.6 C107.2@86,6.3
  Bottom Layer w0.48: pad.1@90,-4 C138.2@90,-3.1 ; C140.2@90.8,1.4 91.4,1.4 pad.1@91.6,1.6 ; pad.1@94,0.8 94.6,0.8 C139.2@94.8,0.6
  Bottom Layer w0.5: C169.2@36.6,-3.1 C169.2@36.8,-3.3 ; C108.2@37.5,6.9 37.8,6.6 C106.2@37.8,5.2
  other v1: 38.45,-4.85 38.45,-4.2 81,4.65 38.5,4.85 80.5,4.95 38.5,5.45
I_1V5: C105.1 IC5.1 R129.2 TP15.1 | length 9.9
  Top Layer w0.102: TP15.1@78.9,6.2 80.9,8.2 83,8.2 v1(83.5,7.7)
  Top Layer w0.3: IC5.1@83,5.7 83,6.6 83.5,7.1 v1(83.5,7.7)
  Bottom Layer w0.3: v1(83.5,7.7) C105.1@84.3,7.7 R129.2@84.3,9
I_2V5RX: C152.1 IC7.1 R131.2 TP16.1 | length 5.2
  Top Layer w0.2: v1(39,-6.1) IC7.1@39,-5.5
  Top Layer w0.3: TP16.1@39,-8 v1(39,-6.1)
  Bottom Layer w0.5: R131.2@36.5,-5.7 38.6,-5.7 v1(39,-6.1)
I_2V5TX: C106.1 IC6.1 R130.2 TP17.1 | length 4.7
  Top Layer w0.2: IC6.1@39,4.2 v1(39,3.6) 39,3 TP17.1@39.6,2.4
  Bottom Layer w0.5: R130.2@36.5,4 38.6,4 v1(39,3.6)
IC1_SCL: IC1.U2 R110.1 | length 32.2
  Top Layer w0.102: v1(52,-8.9) 52,-4.5 IC1.U2@52.5,-4
  Bottom Layer w0.102: v1(52,-8.9) 52.5,-8.9 53.9,-10.3 R110.1@55.7,-10.3 55.7,-19.1 58.75,-22.15 67.55,-22.15 68.2,-21.5
IC1_SDA: IC1.U3 R109.1 | length 34.1
  Top Layer w0.102: v1(53,-8.6) 53,-4.9 IC1.U3@53,-4
  Bottom Layer w0.102: v1(53,-8.6) 54.3,-8.6 54.5,-8.4 59.8,-8.4 60.3,-8.9 60.3,-9.9 59.9,-10.3 R109.1@57.3,-10.3 57.3,-18.4 60.4,-21.5 65.65,-21.5